# Altium PCB IMU_standalone.PcbDoc
Units mil, origin at the board's own origin, x right, y up, seen from the top; angles counter-clockwise.
Board outline 725 x 915 mil, 2 copper layers (Top Layer, Bottom Layer); 14 components, 12 nets, 65 pads, 4 vias.
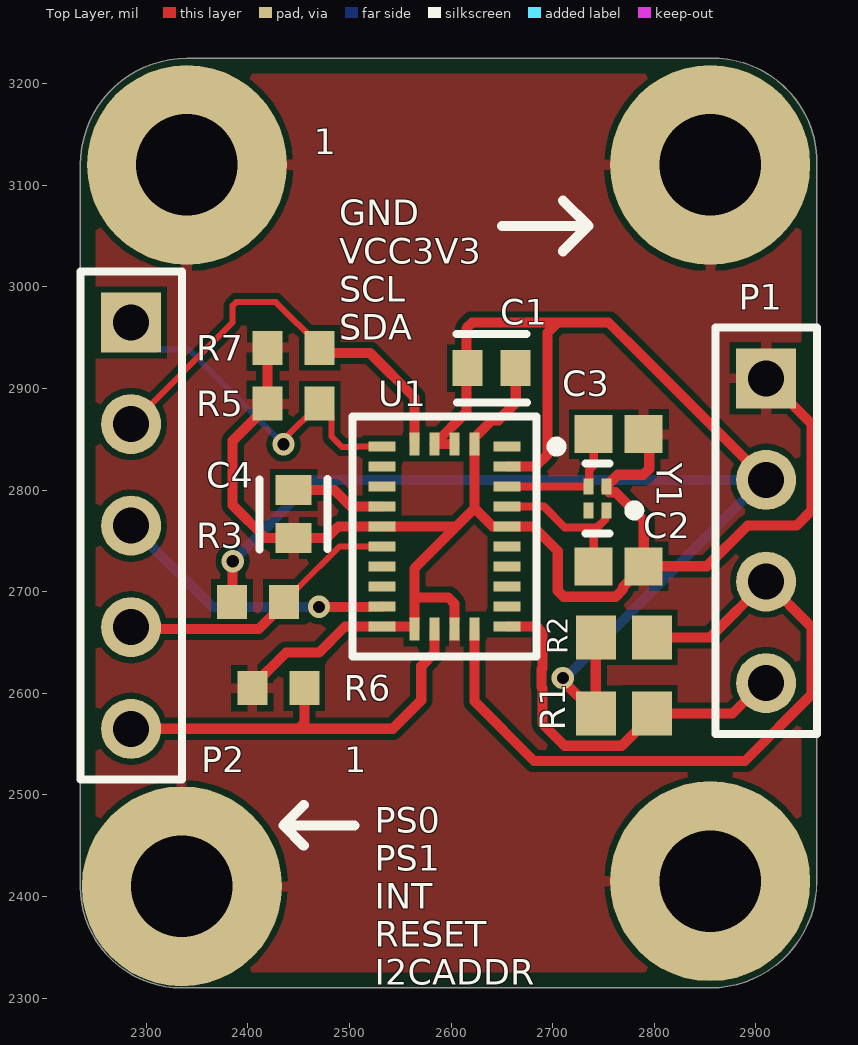
[diagram p0: Top Layer view]
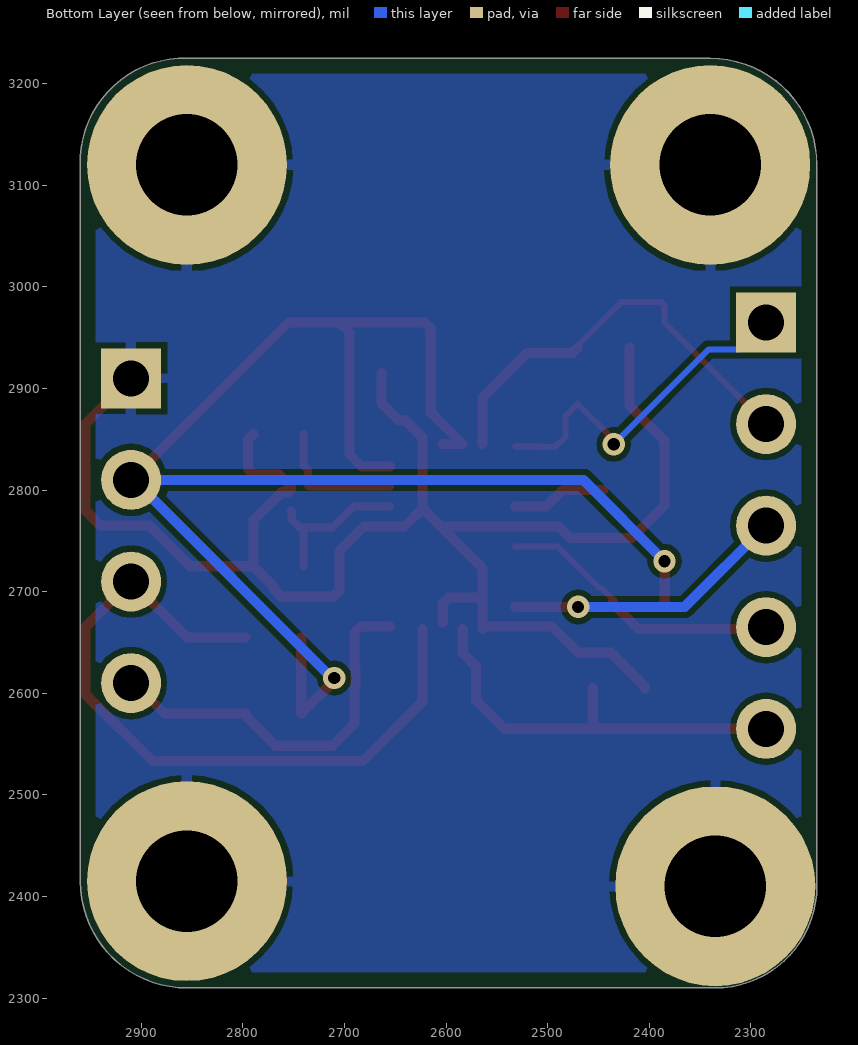
[diagram p1: Bottom Layer view, seen from below]
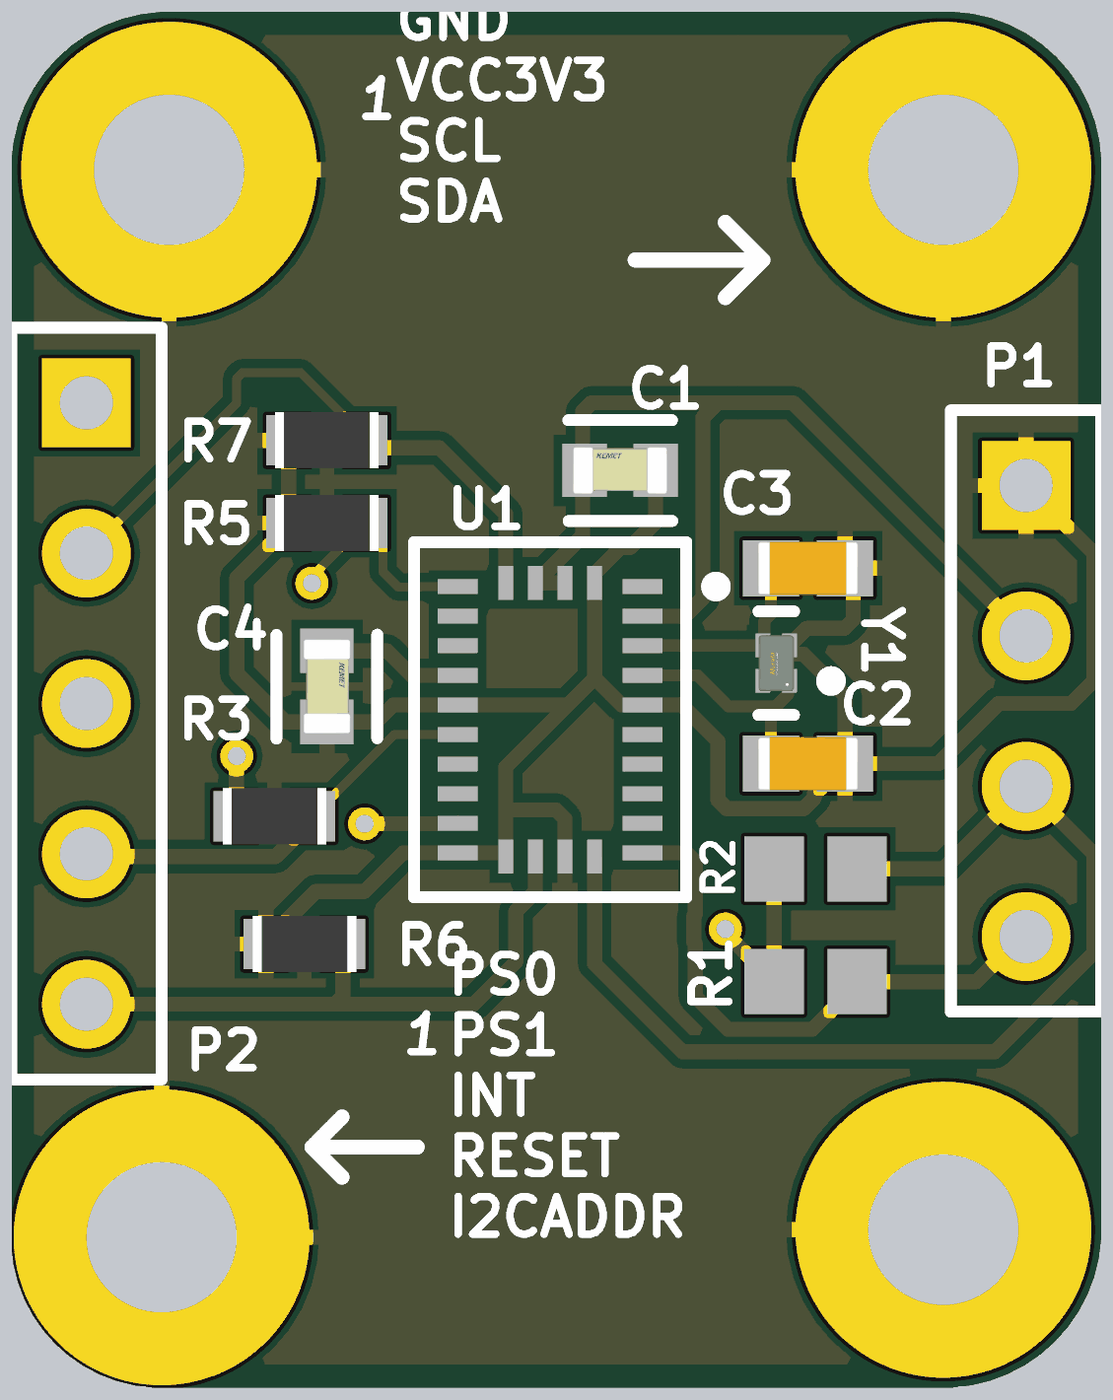
[diagram p2: 3D render of the assembled board from above, using the file's embedded part models]

## Layer stack, top to bottom
Top Solder: solder mask 0.4, Solder Resist, Dk 3.5
Top Layer: signal copper 1.4
Dielectric 1: dielectric 12.6, FR-4, Dk 4.8
Bottom Layer: signal copper 1.4
Bottom Solder: solder mask 0.4, Solder Resist, Dk 3.5

## Board outline
2335,2310 cw(c2335,2410) 2235,2410 2235,3120 cw(c2340,3120) 2340,3225 2855,3225 cw(c2857.5,3122.5) 2960,3120 2960,2415 cw(c2855,2415) 2855,2310

## Design rules (kind name [scope] priority, off if disabled: settings)
BoardOutlineClearance [All] p1: gap=15 ignorepadtopadclearanceinfootprint=FALSE
Clearance "Clearance Polygons" [InPolygon] p1: gap=6 ignorepadtopadclearanceinfootprint=FALSE except(0: Arc-Hole Track-Hole SMDPad-Hole THPad-Hole Via-Hole Fill-Hole Poly-Hole Region-Hole Text-Hole)
Clearance [All] p2: gap=5 ignorepadtopadclearanceinfootprint=FALSE except(0: Arc-Hole Track-Hole SMDPad-Hole THPad-Hole Via-Hole Fill-Hole Poly-Hole Region-Hole Text-Hole; 2: SMDPad-Via)
ComponentClearance "HM-TRP & UFL" [InComponent('X1') vs InComponent('U1')] p1: gap=0 collisioncheckmode=3 verticalgap=0 showdistances=FALSE
ComponentClearance [All] p2: gap=1 collisioncheckmode=3 verticalgap=1 showdistances=FALSE
DiffPairsRouting [All] p1: maxlimit=393.7 minlimit=5 mostfreqgap=8 toplayer_minwidth=5 toplayer_maxwidth=15 toplayer_prefwidth=8 bottomlayer_minwidth=5 bottomlayer_maxwidth=15 bottomlayer_prefwidth=8 maxuncoupledlength=500
HoleSize [All] p1: absolutevalues=TRUE maxlimit=265 minlimit=10 maxpercent=80.000 minpercent=20.000
HoleToHoleClearance [All] p1: gap=10 allowstackedmicrovias=FALSE
MinimumAnnularRing [All] p1: minimumring=4
MinimumSolderMaskSliver [All] p1: minsoldermaskwidth=0
PlaneClearance [All] p1: clearance=10
PlaneConnect [All] p1: planeconnectstyle=Relief reliefexpansion=4 reliefentries=4 reliefconductorwidth=6 reliefairgap=6
PolygonConnect "Via connect style" [isVia] p1: connectstyle=Direct reliefconductorwidth=10 reliefentries=4 polygonreliefangle="90 Angle" airgapwidth=10
PolygonConnect [All] p2: connectstyle=Relief reliefconductorwidth=10 reliefentries=4 polygonreliefangle="90 Angle" airgapwidth=6
RoutingCorners [All] p1: cornerstyle=45-Degree minsetback=49.21 maxsetback=49.21
RoutingVias [All] p1: holewidth=12 width=22 viastyle="Through Hole" minholewidth=10 minwidth=18 maxholewidth=100 maxwidth=114
SilkToSilkClearance [All] p1: silktosilkclearance=0
SilkToSolderMaskClearance [IsPad] p1: minsilkscreentomaskgap=5 clearancetoexposedcopper=TRUE
SolderMaskExpansion [All] p1: expansion=2.5 istentingtop=FALSE
Width [All] p1: maxlimit=400 minlimit=6 preferedwidth=8
20 further rules are at their usual default settings.

## Classes and differential pairs
component class IMU_standalone: C1 C2 C3 C4 P1 P2 R1 R3 R5 R6 R7 U1 Y1

## Components (designator, comment, footprint, x,y, rotation, side; value= is the part's Value field where it differs from the comment)
C1 "C0603C104M4RAC7411" FP-C0603C-CF-MFG 2640,2920 r0 top value="0.10 μF"
C2 "CC0603JRNPO9BN120" CAPC1608X90X40NL10T20 2765,2725 r180 top value=12pF
C3 "CC0603JRNPO9BN120" CAPC1608X90X40NL10T20 2765,2855 r180 top value=12pF
C4 "C0603C104M4RAC7411" FP-C0603C-CF-MFG 2445,2776.38 r270 top value="0.10 μF"
P1 "Header 4" HDR1X4 2910,2910 r270 top
P2 "Header 5" HDR1X5 2285,2965 r270 top
R1 "RR0816P-242-D" RESC1608X50X30ML20T20 2770,2580 r180 top value=2.4kR
R2 "RR0816P-242-D" RESC1608X50X30ML20T20 2770,2655 r180 top value=2.4kR
R3 "ERJ3EKF1002V" RESC1609X55X30LL15T15 2410,2690 r180 top value=10k
R5 "ERJ3EKF1002V" RESC1609X55X30LL15T15 2445,2885 r0 top value=10k
R6 "ERJ3EKF1002V" RESC1609X55X30LL15T15 2430,2605 r0 top value=10k
R7 "ERJ3EKF1002V" RESC1609X55X30LL15T15 2445,2940 r0 top value=10k
U1 "BNO055" FP-BNO055-MFG 2593.48,2754.21 r0 top
Y1 "WMRAG32K76CS1C00R0" FP-WMRAG32K76CS1C00R0-MFG 2743.86,2791.81 r90 top

## Footprints (in the part's own frame and the unit in brackets; to place one, negate y for a bottom-side part, rotate by r counter-clockwise, add the part's x,y. Pads: shape width x height; smd on the part's side, far side on the other; paste and mask are expansions set on the pad)
CAPC1608X90X40NL10T20 [mm] "Chip Capacitor, 2-Leads, Body 1.7x0.9mm, IPC Medium Density"
  rect 0.95x0.95 smd: 1(-0.625,0) 2(0.625,0)
  body extent -0.85,-0.45 0.85,0.45, height 0.9
FP-BNO055-MFG [mm]
  rect 0.675x0.25 smd paste+0 mask+0: 1(1.562,2.25) 6(-1.562,2.25) 7(-1.562,1.75) 8(-1.562,1.25) 9(-1.562,0.75) 10(-1.562,0.25) 11(-1.562,-0.25) 12(-1.562,-0.75) 13(-1.562,-1.25) 14(-1.562,-1.75) 15(-1.562,-2.25) 20(1.562,-2.25) 21(1.562,-1.75) 22(1.562,-1.25) 23(1.562,-0.75) 24(1.562,-0.25) 25(1.562,0.25) 26(1.562,0.75) 27(1.562,1.25) 28(1.562,1.75)
  rect 0.25x0.575 smd paste+0 mask+0: 2(0.75,2.312) 3(0.25,2.312) 4(-0.25,2.312) 5(-0.75,2.312) 16(-0.75,-2.312) 17(-0.25,-2.312) 18(0.25,-2.312) 19(0.75,-2.312)
  silkscreen extent -2.3,-3 2.93,3
FP-C0603C-CF-MFG [mm]
  rect 0.75x0.9 smd paste+0 mask+0: 1(-0.6,0) 2(0.6,0)
  silkscreen extent -0.87,-0.85 0.88,0.85, body extent -1.2,-0.6 1.2,0.6, height 0.25
FP-WMRAG32K76CS1C00R0-MFG [mm]
  rect 0.4x0.25 smd paste+0 mask+0: 1(-0.3,-0.225) 2(0.3,-0.225) 3(0.3,0.225) 4(-0.3,0.225)
  silkscreen extent -0.87,-1.05 0.87,0.3, body extent -0.6,-0.45 0.6,0.45, height 0.25
HDR1X4 [mm] "Connector; Header; 4 Position"
  rect 1.5x1.5 hole 0.9: 1(0,0)
  round 1.5 hole 0.9: 2(2.54,0) 3(5.08,0) 4(7.62,0)
  silkscreen extent -1.27,-1.27 8.89,1.27
HDR1X5 [mm] "Connector; Header; 5 Position"
  rect 1.5x1.5 hole 0.9: 1(0,0)
  round 1.5 hole 0.9: 2(2.54,0) 3(5.08,0) 4(7.62,0) 5(10.16,0)
  silkscreen extent -1.27,-1.27 11.43,1.27
RESC1608X50X30ML20T20 [mm] "Chip Resistor, 2-Leads, Body 1.60x0.80mm, IPC Low Density"
  rect 1x1.1 smd: 1(-0.7,0) 2(0.7,0)
  body extent -0.9,-0.5 0.9,0.5, height 0.5
RESC1609X55X30LL15T15 [mm] "Chip Resistor, 2-Leads, Body 1.75x0.95mm, IPC High Density"
  rect 0.75x0.85 smd: 1(-0.65,0) 2(0.65,0)
  body extent -0.87,-0.48 0.87,0.48, height 0.55

## Part data
C1 C4: library part CMP-03020-016578-1, "CAP CER 0.1UF 16V X7R 0603", Capacitance="0.10 μF", Manufacturer=KEMET, Package=C0603C-CF, Temperature="-55°C to +125°C", Temperature Characteristic=X7R, Temperature Coefficient=30ppm/°C, Temperature Range High=+125°C, Temperature Range Low=-55°C, Tolerance=0.2, Voltage Rating="16 V", Automotive=Yes, Automotive Grade="Grade 1", Category=Cap, ComponentLink2Description=Datasheet, ComponentLink2URL=https://api.kemet.com/component-edge/download/datasheet/C0603C100J5GACAUTO.pdf, Device Class L1="Passive Components", Device Class L2=Capacitors, Device Class L3="Ceramic Capacitors", Digikey Description="CAP CER 0.1UF 16V X7R 0603", Height=0.87mm, Lead Free=Yes, Manufacturer Part Number=C0603C104M4RAC7411, Material=Ceramic, Mouser Description="Multilayer Ceramic Capacitors MLCC - SMD/SMT 16volts 0.1uF X7R 20%", Octopart=https://octopart.com/c0603c104m4rac7411-kemet-9138805, RoHS=TRUE
C2 C3: library part CMP-1659-00031-1, "Chip Capacitor, 12 pF, +/- 5%, 50 V, -55 to 125 degC, 0603 (1608 Metric), RoHS, Tape and Reel", Case\Package=Axial, Max Operating Temperature="155 degC", Min Operating Temperature="-55 degC", Package Quantity=200, Power Rating="250 mW", Resistance="475 kohm", Tolerance=1%, Voltage Rating="250 V", ComponentLink1Description="Manufacturer URL", ComponentLink1URL=http://www.yageo.com/, ComponentLink2Description=Datasheet, ComponentLink2URL=http://www.yageo.com/NewPortal/yageodocoutput?fileName=/pdf/MLCC/UPY-GP_NP0_16V-to-50V_14.pdf, DatasheetVersion="Rev. 14, 07/2016", Length="0.248 inch", Mount="Through Hole", PackageDescription="2-Pin Surface Mount Device, Body 1.6 x 0.8 mm", PackageReference=0603, Packaging=Bulk, RoHSCompliant=true
P1: "Header, 4-Pin", LatestRevisionDate=17-Jul-2002, LatestRevisionNote="Re-released for DXP Platform.", Publisher="Altium Limited"
P2: "Header, 5-Pin", LatestRevisionDate=17-Jul-2002, LatestRevisionNote="Re-released for DXP Platform.", Publisher="Altium Limited"
R1 R2: library part CMP-2000-02561-1, Manufacturer=Susumu, Part Number=RR0816P-242-D
R3 R5 R6 R7: library part CMP-2000-07452-1, "Chip Resistor, 10 KOhm, +/- 1%, 0.1 W, -55 to 155 degC, 0603 (1608 Metric), RoHS, Tape and Reel", Case Code (Imperial)=0603, Case Code (Metric)=1608, Manufacturer=Panasonic, Max Operating Temperature=155degC, Max Power Dissipation=100mW, Min Operating Temperature=-55degC, Package Description="2-Pin Surface Mount Device, Body 1.6 x 0.85 mm", Package Quantity=1, Package Reference=603, Resistance=10KOhm, Temperature Coefficient=100ppm\/degreesC, Tolerance=1%, Voltage Rating=75V, Case\/Package=0603, Composition=ThickFilm, Contact Plating=Tin, Datasheet URL=https://industrial.panasonic.com/cdbs/www-data/pdf/RDA0000/AOA0000C304.pdf, Datasheet Version=02/2017, Depth=0.8mm, Height=0.45mm, Lead Free=LeadFree, Length=1.6mm, Manufacturer URL=http://www.panasonic.com/, Military Standard=Not, Mount=SurfaceMount, Mounting Technology=SurfaceMount, Number of Pins=2, Number of Terminations=2, Packaging=TapeandReel, Power Rating=100mW, Radiation Hardening=No, REACH SVHC=NoSVHC, RoHSCompliant=true, Termination=SMD/SMT, Voltage Rating (DC)=75V, Width=0.031inch
U1: library part CMP-191067-000002-1, "IMU ACCEL/GYRO/MAG I2C 28LGA", Ambient Temperature Range High=+85°C, Ambient Temperature Range Low=-40°C, Manufacturer="Bosch Sensortech", Max Supply Voltage=3.6V, Min Supply Voltage=1.7V, Operating Supply Current=12.3mA, Package=0, Temperature="-40°C to +85°C", Voltage=1.7~3.6V, Accel Range=2/4/8/16g, Accel Resolution=14bits, Accel Sensitivity=0.001LSB/g, Automotive=No, Category=IC, ComponentLink2Description=Datasheet, ComponentLink2URL=https://ae-bst.resource.bosch.com/media/_tech/media/datasheets/BST-BNO055-DS000.pdf, Device Class L1=Sensors, Device Class L2="Motion Sensors", Device Class L3="Inertial Measurement Units (IMUs)", Digikey Description="IMU ACCEL/GYRO/MAG I2C 28LGA", Gyro Range=125/250/500/1000/2000°/s, Gyro Sensitivity=16LSB/°/s, Height=1.18mm, Lead Free=Yes, Mag Sense Range=1300-2500uT, Manufacturer Part Number=BNO055, Mouser Description="BNO055 Series 1.7 to 3.6 V Intelligent 9-Axis Absolute Orientation Sensor-LGA-28", Octopart=https://octopart.com/bno055-bosch+sensortec-50309911, RoHS=TRUE, Sensor Output=I2C,UART, Sensor Type=Accelerometer,Gyroscope,Magnetometer, Temperature Range High=+85°C, Temperature Range Low=-40°C
Y1: library part CMP-06054-000002-1, "MEMS Resonator", Frequency=32.768kHz, Load Capacitance=8pF, Manufacturer=Murata, Temperature="-30°C to +85°C", Temperature Range High=+85°C, Temperature Range Low=-30°C, Tolerance=20ppm, Automotive=No, Category=Crys, ComponentLink2Description=Datasheet, ComponentLink2URL=https://www.murata.com/en-us/products/productdetail?partno=WMRAG32K76CS1C00R0, Device Class L1="Passive Components", Device Class L2="Crystals / Oscillators", Device Class L3=Crystals, ESR=75kΩ, Footprint Url=https://forum.upverter.com/uploads/default/original/3X/c/9/c928dfaf44ae48bfe51164a60c1d28063cd1860b.pdf, Lead Free=Yes, Manufacturer Part Number=WMRAG32K76CS1C00R0, Octopart=https://octopart.com/wmrag32k76cs1c00r0-murata-103936783, Package=WMRAG32K76CS1C00R0, RoHS=TRUE

## Free pads (board coordinates)
  round 196.85 hole 100: C1(2340,3120) C2(2855,3120) C3(2335,2410) C4(2855,2415)

## Via types
v1: diameter 22, hole 12, Top Layer to Bottom Layer, 4 vias

## Nets (pads, with @x,y where several pads share a name; then routed paths per layer and width w, separated by ;. In a path a pad name is that pad's centre, name@x,y a point inside that pad or via, vN(x,y) a via of type N, cw(c..) or ccw(c..) an arc to the next point about the centre after c; other vN are vias at no path point)
BNO055_INT: P2.3 U1.14 | length 280.2
  Top Layer w10: v1(2470,2685) 2531.65,2685 U1.14
  Bottom Layer w10: P2.3 2365,2685 v1(2470,2685)
BNO055_RESET: P2.4 R3.1 U1.11 | length 283.6
  Top Layer w6: R3.1 2435.59,2691.97 2447.35,2703.73 2449.32,2703.73 2489.96,2744.37 U1.11
  Top Layer w10: P2.4 2286.73,2663.27 2410.83,2663.27 2435.59,2688.03 R3.1
GND: C1.2 C2.1 C3.1 C4.2 P1.1 pad.C1 pad.C2 pad.C3 pad.C4 R5.1 R6.1 R7.1 U1.2 U1.10 U1.15 U1.16 U1.18 U1.25 Y1.2 | length 1710
  Top Layer w10: R6.1 2404.41,2606.97 2437.44,2640 2470,2640 2495.63,2665.63 U1.15 2563.88,2665.63 U1.16@2563.96,2665.55 ; R7.1 R5.1 2419.41,2883.03 2385,2848.62 2385,2785 2417.24,2752.76 2477.72,2752.76 2489.02,2764.06 U1.10 2605.08,2764.06 ; U1.16 U1.16@2563.96,2665.55 ; U1.18@2603.25,2669.49 2603.25,2688.38 2597.39,2694.24 2563.96,2694.24 ; C1.2@2663.62,2915 2663.62,2885.87 2646.48,2868.72 2640.24,2868.72 2623.01,2851.5 U1.2 2623.01,2781.99 ; C3.1 2795,2849.61 2795,2820.86 2789.14,2815 2764.09,2815 Y1.2 2752.72,2800.83 2755.67,2797.87 2761.78,2797.87 2789.61,2770.05 C2.1 ; P1.1 2955,2865 2955,2780 2940,2765 2891.65,2765 2851.65,2725 C2.1 ; U1.16@2563.96,2665.55 2563.96,2694.24 ; 2563.96,2694.24 2563.96,2722.93 2605.08,2764.06 ; 2605.08,2764.06 2623.01,2781.99 ; 2623.01,2781.99 2640.87,2764.13 2654.92,2764.13 U1.25 2680.94,2764.06 2705,2740 2705,2700.86 2710.86,2695 2761.94,2695 2769.09,2702.16 2769.09,2704.49 C2.1
I2C_ADDR: P2.5 R6.2 U1.17 | length 415.1
  Top Layer w10: P2.5 2450,2565 ; R6.2 2455.59,2570.59 2450,2565 ; U1.17 2583.56,2663.09 2583.56,2639.7 2570.59,2626.73 2570.59,2593.03 2542.56,2565 2450,2565
I2C_SCL: P1.3 R2.1 U1.19 | length 719.5
  Top Layer w10: U1.19 2623.01,2591.99 2681.65,2533.35 2889.25,2533.35 2955,2599.1 2955,2665 P1.3 2855,2655 R2.1
I2C_SDA: P1.4 R1.1 U1.20 | length 383.7
  Top Layer w10: U1.20 2684.14,2665.63 2690,2659.77 2690,2624.7 2689,2623.7 2689,2606.3 2690,2605.3 2690,2570 2711.65,2548.35 2767.87,2548.35 2797.56,2578.03 R1.1 2877.03,2580 2907.03,2610 P1.4
NetC4_1: C4.1 U1.9 | length 93.7
  Top Layer w10: C4.1 2485,2800 2501.26,2783.74 U1.9
PS0: P2.1 R5.2 U1.6 | length 345.6
  Top Layer w6: v1(2435,2845) 2435,2849.41 R5.2 2482.35,2873.24 2482.35,2852.65 2492.51,2842.49 2506.94,2842.49 2507.25,2842.8 U1.6
  Bottom Layer w6: P2.1 2311.53,2938.47 2341.53,2938.47 v1(2435,2845)
PS1: P2.2 R7.2 U1.5 | length 424.2
  Top Layer w6: P2.2 2385,2965 2385,2981.49 2388.51,2985 2427.56,2985 2470.59,2941.97 R7.2
  Top Layer w10: R7.2 2475.59,2935 2520,2935 2563.96,2891.04 U1.5
VCC: C1.1 P1.2 R1.2 R2.2 R3.2 U1.3 U1.4 U1.28 | length 1687.3
  Top Layer w10: R3.2 2384.7,2690.3 2384.7,2729.7 v1(2385,2730) ; U1.3 U1.4 2615,2876.61 2615,2959.14 2620.86,2965 2705,2965 ; U1.28 2683.11,2823.11 2695,2835 2695,2955 2705,2965 ; v1(2710,2615) 2710,2612.44 R1.2 R2.2 ; P1.2 2790,2930 2755,2965 2705,2965
  Bottom Layer w10: v1(2385,2730) 2465,2810 P1.2@2907.5,2810 ; v1(2710,2615) 2712.5,2615 P1.2@2907.5,2810 ; P1.2 P1.2@2907.5,2810
XIN32: C3.2 U1.27 Y1.3 | length 133.7
  Top Layer w8: U1.27 2655.1,2803.52 2734.9,2803.52 Y1.3 2735.92,2804.54 2735.92,2819.83 2740.39,2824.3 C3.2
XOUT32: C2.2 U1.26 Y1.1 | length 157.3
  Top Layer w8: U1.26 2691.26,2783.74 2711.87,2763.13 2743.65,2763.13 ; C2.2 2740.39,2759.87 2743.65,2763.13 ; Y1.1 2751.8,2779.08 2751.8,2771.27 2743.65,2763.13
pads on no net: U1.1 U1.7 U1.8 U1.12 U1.13 U1.21 U1.22 U1.23 U1.24 Y1.4

## Polygon pours and split planes (outlines as drawn)
GND on Top Layer "NONET_L02_P-001" (solid, pour order 0): 2235,3225 2235,2310 2955,2310 2960,2305 2960,3225
GND on Bottom Layer "NONET_L02_P-001" (solid, pour order 4): 2230,3235 2235,3230 2235,2305 2975,2305 2980,2310 2965,2325 2965,3235
no net on Bottom Layer "NONET_L02_P-001" (hatched Vertical grid 20 track 8, pour order 3): 2230,3235
no net on Bottom Layer "NONET_L02_P-001" (hatched Vertical grid 20 track 8, pour order 2): 2240,3230
no net on Bottom Layer "NONET_L02_P-001" (hatched Vertical grid 20 track 8, pour order 1): 2240,3230

## Silkscreen, mask and mechanical layers (free items; w line width, h text height)
Top Overlay:
  lines w10: 2455,2450 2435,2470 ; 2455,2490 2435,2470 ; 2505,2470 2435,2470 ; 2650,3060 2735,3060 ; 2710,3035 2735,3060 ; 2710,3085 2735,3060
  text "1" at 2465,3130.5 h25
  text "GND / VCC3V3 / SCL / SDA" at 2490,2947.92 h25
  text "1" at 2495,2522.5 h25
  text "PS0 / PS1 / INT / RESET / I2CADDR" at 2525,2312.92 h25
Mechanical 1:
  the board outline again, w10